# Altium PCB 前瞻PCB.PcbDoc
Units mm, origin at the board's own origin, x right, y up, seen from the top; angles counter-clockwise.
Board outline 199.77 x 9.14 mm, 2 copper layers (Top Layer, Bottom Layer); 12 components, 6 nets, 27 pads, 0 vias.
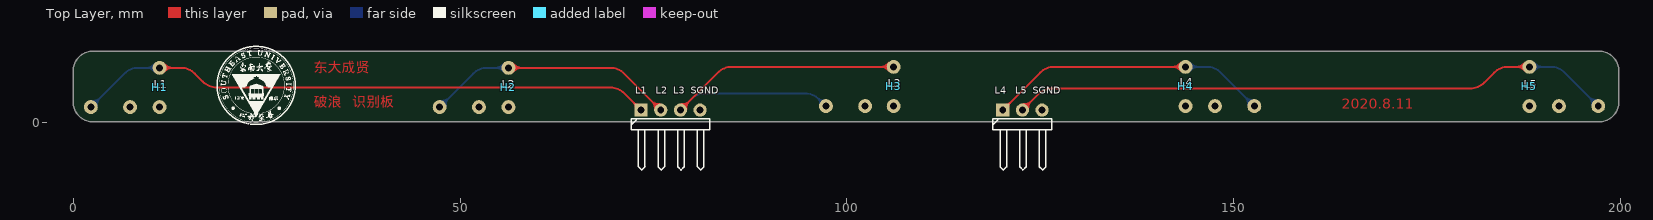
[diagram p0: Top Layer view]
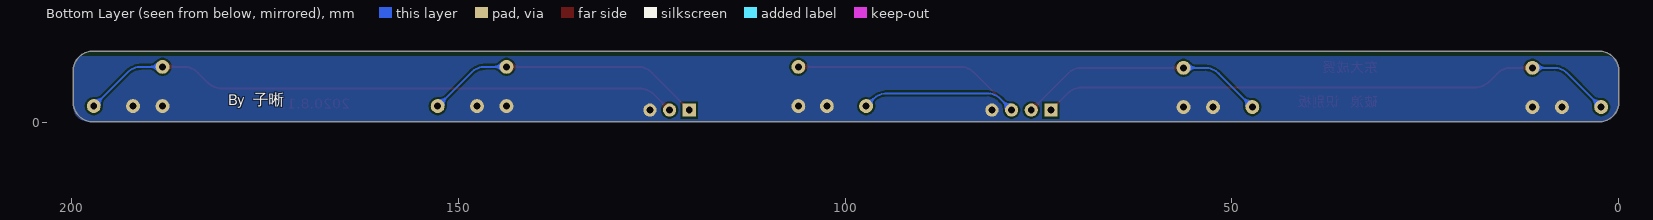
[diagram p1: Bottom Layer view, seen from below]

## Layer stack, top to bottom
Top Solder: solder mask 0.0102, Solder Resist, Dk 3.5
Top Layer: signal copper 0.0356
Dielectric 1: dielectric 0.32, FR-4, Dk 4.8
Bottom Layer: signal copper 0.0356
Bottom Solder: solder mask 0.0102, Solder Resist, Dk 3.5

## Board outline
0,2.729 0,6.669 cw(c2.602,6.669) 2.602,9.271 197.169,9.271 cw(c197.169,6.669) 199.771,6.669 199.771,2.729 cw(c197.169,2.729) 197.169,0.127 2.602,0.127 cw(c2.602,2.729)

## Design rules (kind name [scope] priority, off if disabled: settings)
Clearance [All] p1: gap=0.254 ignorepadtopadclearanceinfootprint=FALSE
ComponentClearance [All] p1 off: gap=0.254 collisioncheckmode=3 verticalgap=0 showdistances=FALSE
PlaneConnect [All] p1: planeconnectstyle=Direct reliefexpansion=0.508 reliefentries=4 reliefconductorwidth=0.254 reliefairgap=0.254
PolygonConnect [All] p1: connectstyle=Direct reliefconductorwidth=0.254 reliefentries=4 polygonreliefangle="90 Angle" airgapwidth=0.254
RoutingVias [All] p1: holewidth=0.711 width=1.27 viastyle="Through Hole" minholewidth=0.711 minwidth=1.27 maxholewidth=0.711 maxwidth=1.27
SilkToSilkClearance [All] p1: silktosilkclearance=0
SilkToSolderMaskClearance [IsPad] p1: minsilkscreentomaskgap=0 clearancetoexposedcopper=TRUE
SolderMaskExpansion [All] p1: expansion=0.102
Width [All] p1: maxlimit=0.254 minlimit=0.254 preferedwidth=0.254
26 further rules are at their usual default settings.

## Classes and differential pairs
component class ǰհ: H1 H2 H4 H5 L1 "L1   L2  L3  SGND" L2 L3 L4 "L4   L5  SGND" L5

## Components (designator, comment, footprint, x,y, rotation, side; value= is the part's Value field where it differs from the comment)
H1 "10uH" 8*10工字电感 11.176,7.112 r270 top
H2 "10uH" 8*10工字电感 56.261,7.112 r270 top
H3 "10uH" 8*10工字电感 106.045,7.239 r270 top
H4 "10uH" 8*10工字电感 143.764,7.239 r270 top
H5 "10uH" 8*10工字电感 188.214,7.239 r270 top
L1 "10uH" 8*10工字电感 2.286,2.032 r0 top
"L1   L2  L3  SGND" "HDR-1X4" HDR2.54-WI-4P 77.216,1.651 r0 top (schematic designator JP1)
L2 "10uH" 8*10工字电感 47.371,2.032 r0 top
L3 "10uH" 8*10工字电感 97.282,2.159 r0 top
L4 "10uH" 8*10工字电感 152.654,2.159 r180 top
"L4   L5  SGND" "HDR-1X3" HDR2.54-WI-3P 122.682,1.651 r0 top (schematic designator JP2)
L5 "10uH" 8*10工字电感 197.104,2.159 r180 top

## Footprints (in the part's own frame and the unit in brackets; to place one, negate y for a bottom-side part, rotate by r counter-clockwise, add the part's x,y. Pads: shape width x height; smd on the part's side, far side on the other; paste and mask are expansions set on the pad)
8*10工字电感 [mm]
  round 1.8 hole 0.9: 1(0,0) 2(5.08,0)
HDR2.54-WI-3P [mm] "弯脚排针，3脚"
  rect 1.7x1.7 hole 0.9: 1(-2.54,0)
  round 1.7 hole 0.9: 2(0,0) 3(2.54,0)
  silkscreen extent -3.81,-7.76 3.81,-1.14, body extent -3.81,-7.77 3.81,1.27, height 4.85
HDR2.54-WI-4P [mm] "弯脚排针，4脚"
  rect 1.7x1.7 hole 0.9: 1(-3.81,0)
  round 1.7 hole 0.9: 2(-1.27,0) 3(1.27,0) 4(3.81,0)
  silkscreen extent -5.08,-7.76 5.08,-1.14, body extent -5.08,-7.77 5.08,1.27, height 4.85

## Part data
H1 H2 H3 H4 H5 L1 L2 L3 L4 L5: library part L-PK, "工字电感"
"L1   L2  L3  SGND": library part "Header 4", "4P接插件"
"L4   L5  SGND": library part "Header 3", "3P接插件"

## Nets (pads, with @x,y where several pads share a name; then routed paths per layer and width w, separated by ;. In a path a pad name is that pad's centre, name@x,y a point inside that pad or via, vN(x,y) a via of type N, cw(c..) or ccw(c..) an arc to the next point about the centre after c; other vN are vias at no path point)
L1: "L1   L2  L3  SGND.1" H1.1 L1.1 | length 75
  Top Layer w0.254: H1.1 13.934,7.112 cw(c13.934,4.572) 15.73,6.368 16.782,5.316 ccw(c18.578,7.112) 18.578,4.572 69.433,4.572 cw(c69.433,2.032) 71.229,3.828 73.406,1.651
  Bottom Layer w0.254: L1.1 6.622,6.368 cw(c8.418,4.572) 8.418,7.112 H1.1
L2: "L1   L2  L3  SGND.2" H2.1 L2.1 | length 32.7
  Top Layer w0.254: H2.1 69.433,7.112 cw(c69.433,4.572) 71.229,6.368 75.946,1.651
  Bottom Layer w0.254: L2.1 51.707,6.368 cw(c53.503,4.572) 53.503,7.112 H2.1
L3: "L1   L2  L3  SGND.3" H3.1 L3.1 | length 50.3
  Top Layer w0.254: 78.486,1.651 83.33,6.495 cw(c85.126,4.699) 85.126,7.239 ; 84.963,7.239 85.126,7.239 ; H3.1 85.126,7.239
  Bottom Layer w0.254: 78.486,1.651 79.927,3.092 cw(c81.661,1.36) 81.661,3.811 94.578,3.811 cw(c94.578,1.271) 96.374,3.067 L3.1 L3.1@97.282,2.377
L4: "L4   L5  SGND.1" H4.1 L4.1 | length 36.7
  Top Layer w0.254: 120.142,1.651 124.986,6.495 cw(c126.782,4.699) 126.782,7.239 H4.1
  Bottom Layer w0.254: H4.1 146.522,7.239 cw(c146.522,4.699) 148.318,6.495 L4.1
L5: "L4   L5  SGND.2" H5.1 L5.1 | length 78.4
  Top Layer w0.254: 122.682,1.651 124.732,3.701 cw(c126.528,1.905) 126.528,4.445 180.558,4.445 ccw(c180.558,6.985) 182.354,5.189 183.66,6.495 cw(c185.456,4.699) 185.456,7.239 H5.1
  Bottom Layer w0.254: H5.1 190.972,7.239 cw(c190.972,4.699) 192.768,6.495 L5.1
SGND: "L1   L2  L3  SGND.4" "L4   L5  SGND.3" H1.2 H2.2 H3.2 H4.2 H5.2 L1.2 L2.2 L3.2 L4.2 L5.2

## Polygon pours and split planes (outlines as drawn)
SGND on Bottom Layer "Bottom Layer-SGND" (solid, remove dead copper, pour order 0): 198.882,8.636 199.027,8.491 cw(c197.231,6.695) 199.771,6.695 199.771,2.159 cw(c197.739,2.159) 197.739,0.127 2.54,0.127 cw(c2.54,2.667) 0,2.667 0,6.985 cw(c1.651,6.985) 1.651,8.636

## Other copper
Top Layer:
  text "东大成贤" at 31.115,6.096 h2.29
  text "破浪   识别板" at 31.115,1.651 h2.29
  text "2020.8.11" at 163.957,1.397 h2.29

## Silkscreen, mask and mechanical layers (free items; w line width, h text height)
Top Overlay:
  drawing of 67 lines, arcs and shapes, not listed
Bottom Overlay:
  text "By  子晰" at 179.705,1.778 h2.54
Mechanical 1:
  the board outline again, w0.254